# Allegro board TC275_lowvol_V015.brd
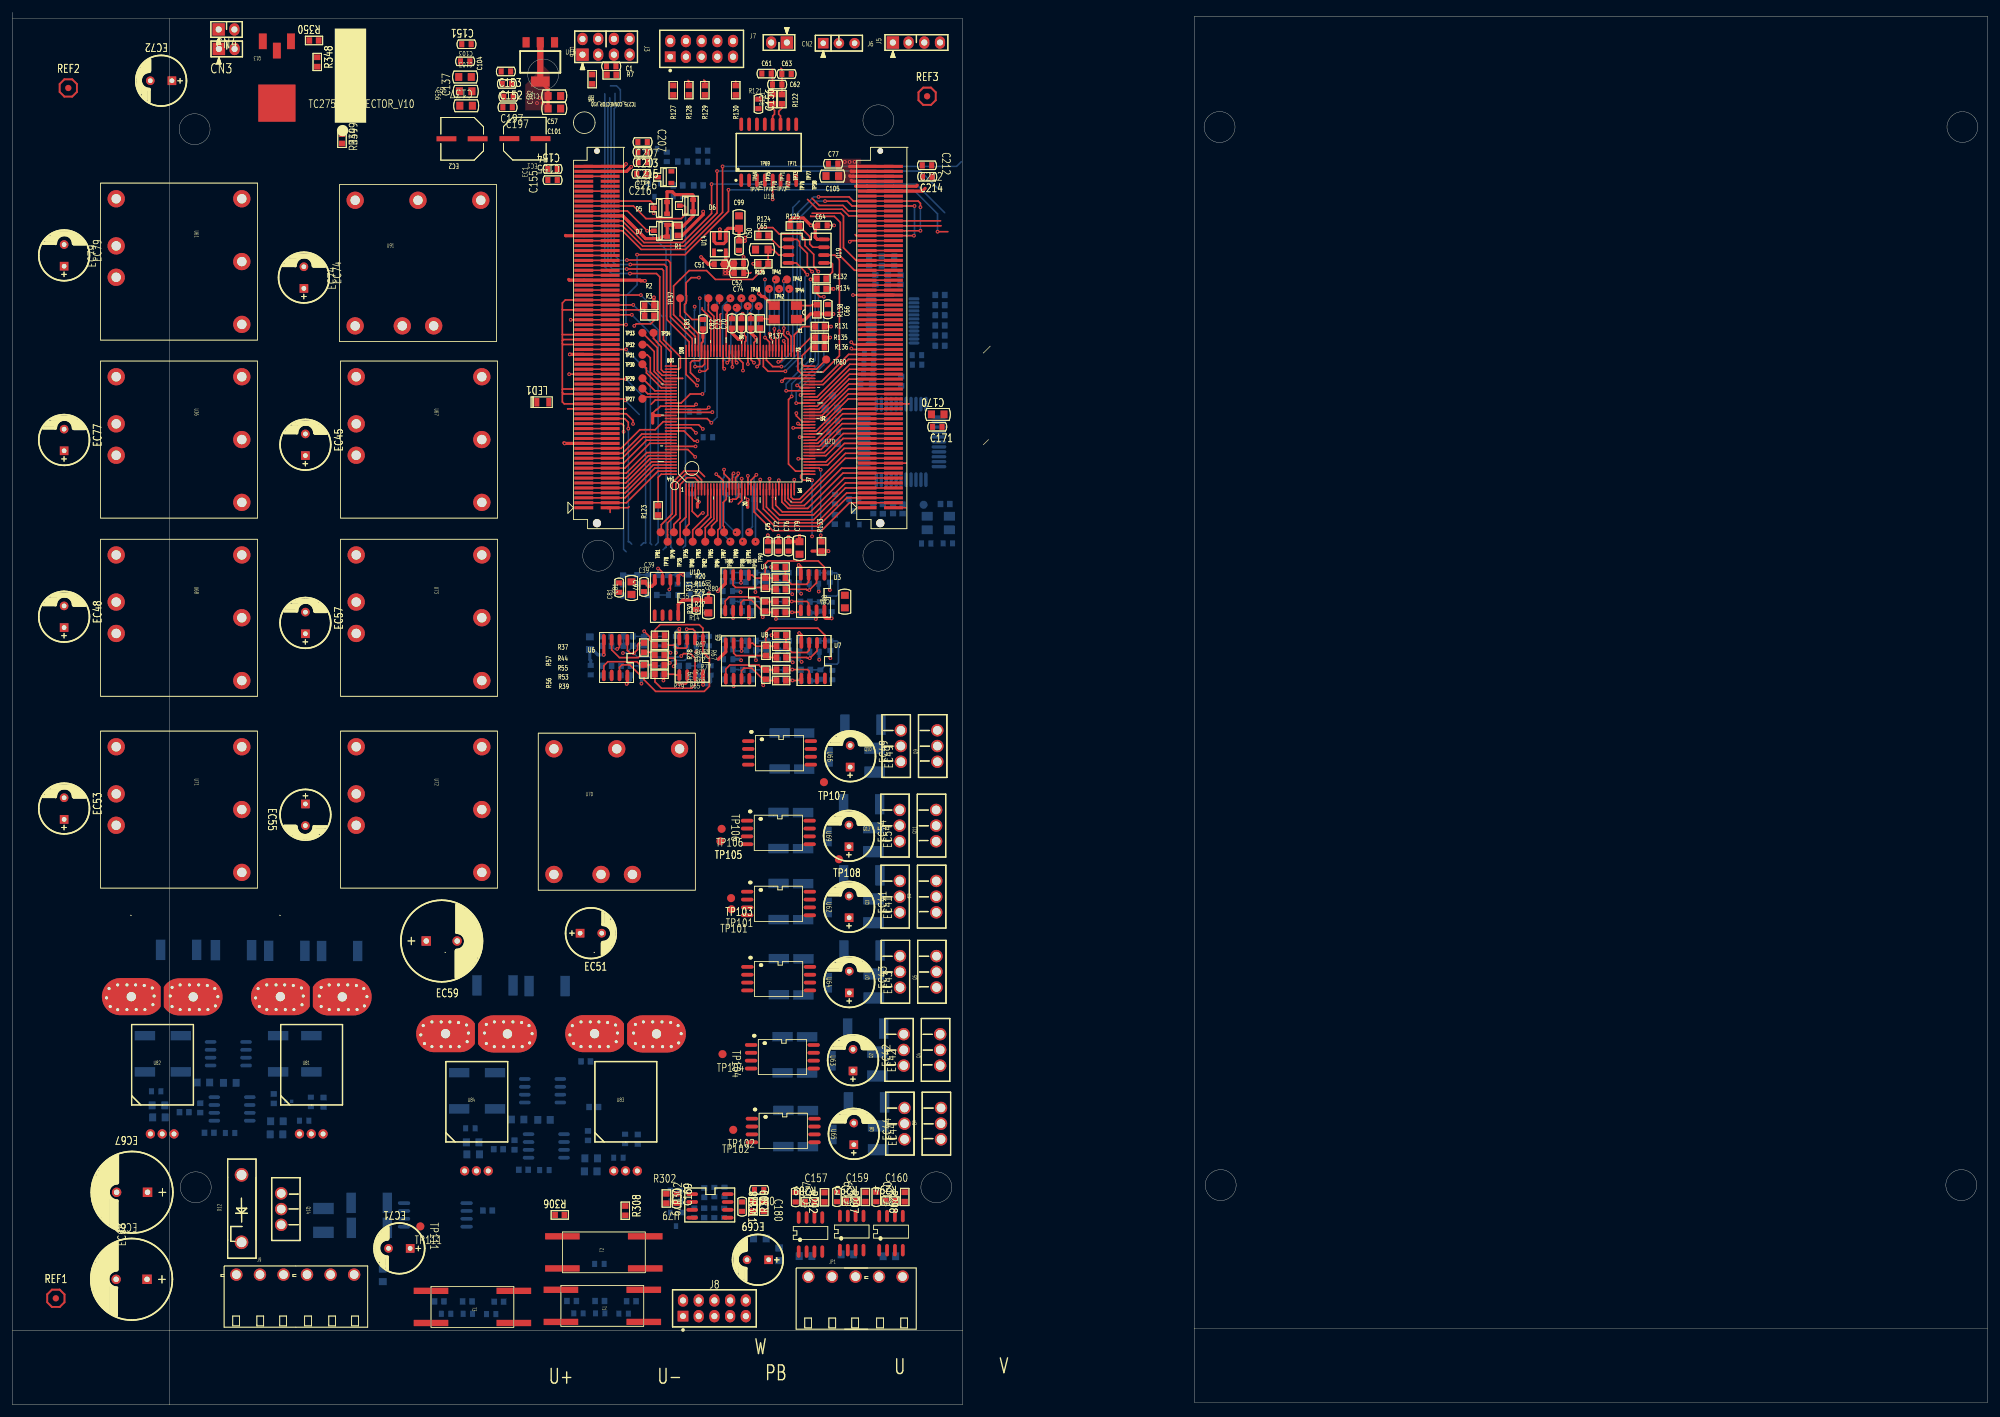
[diagram p0: board, top side]
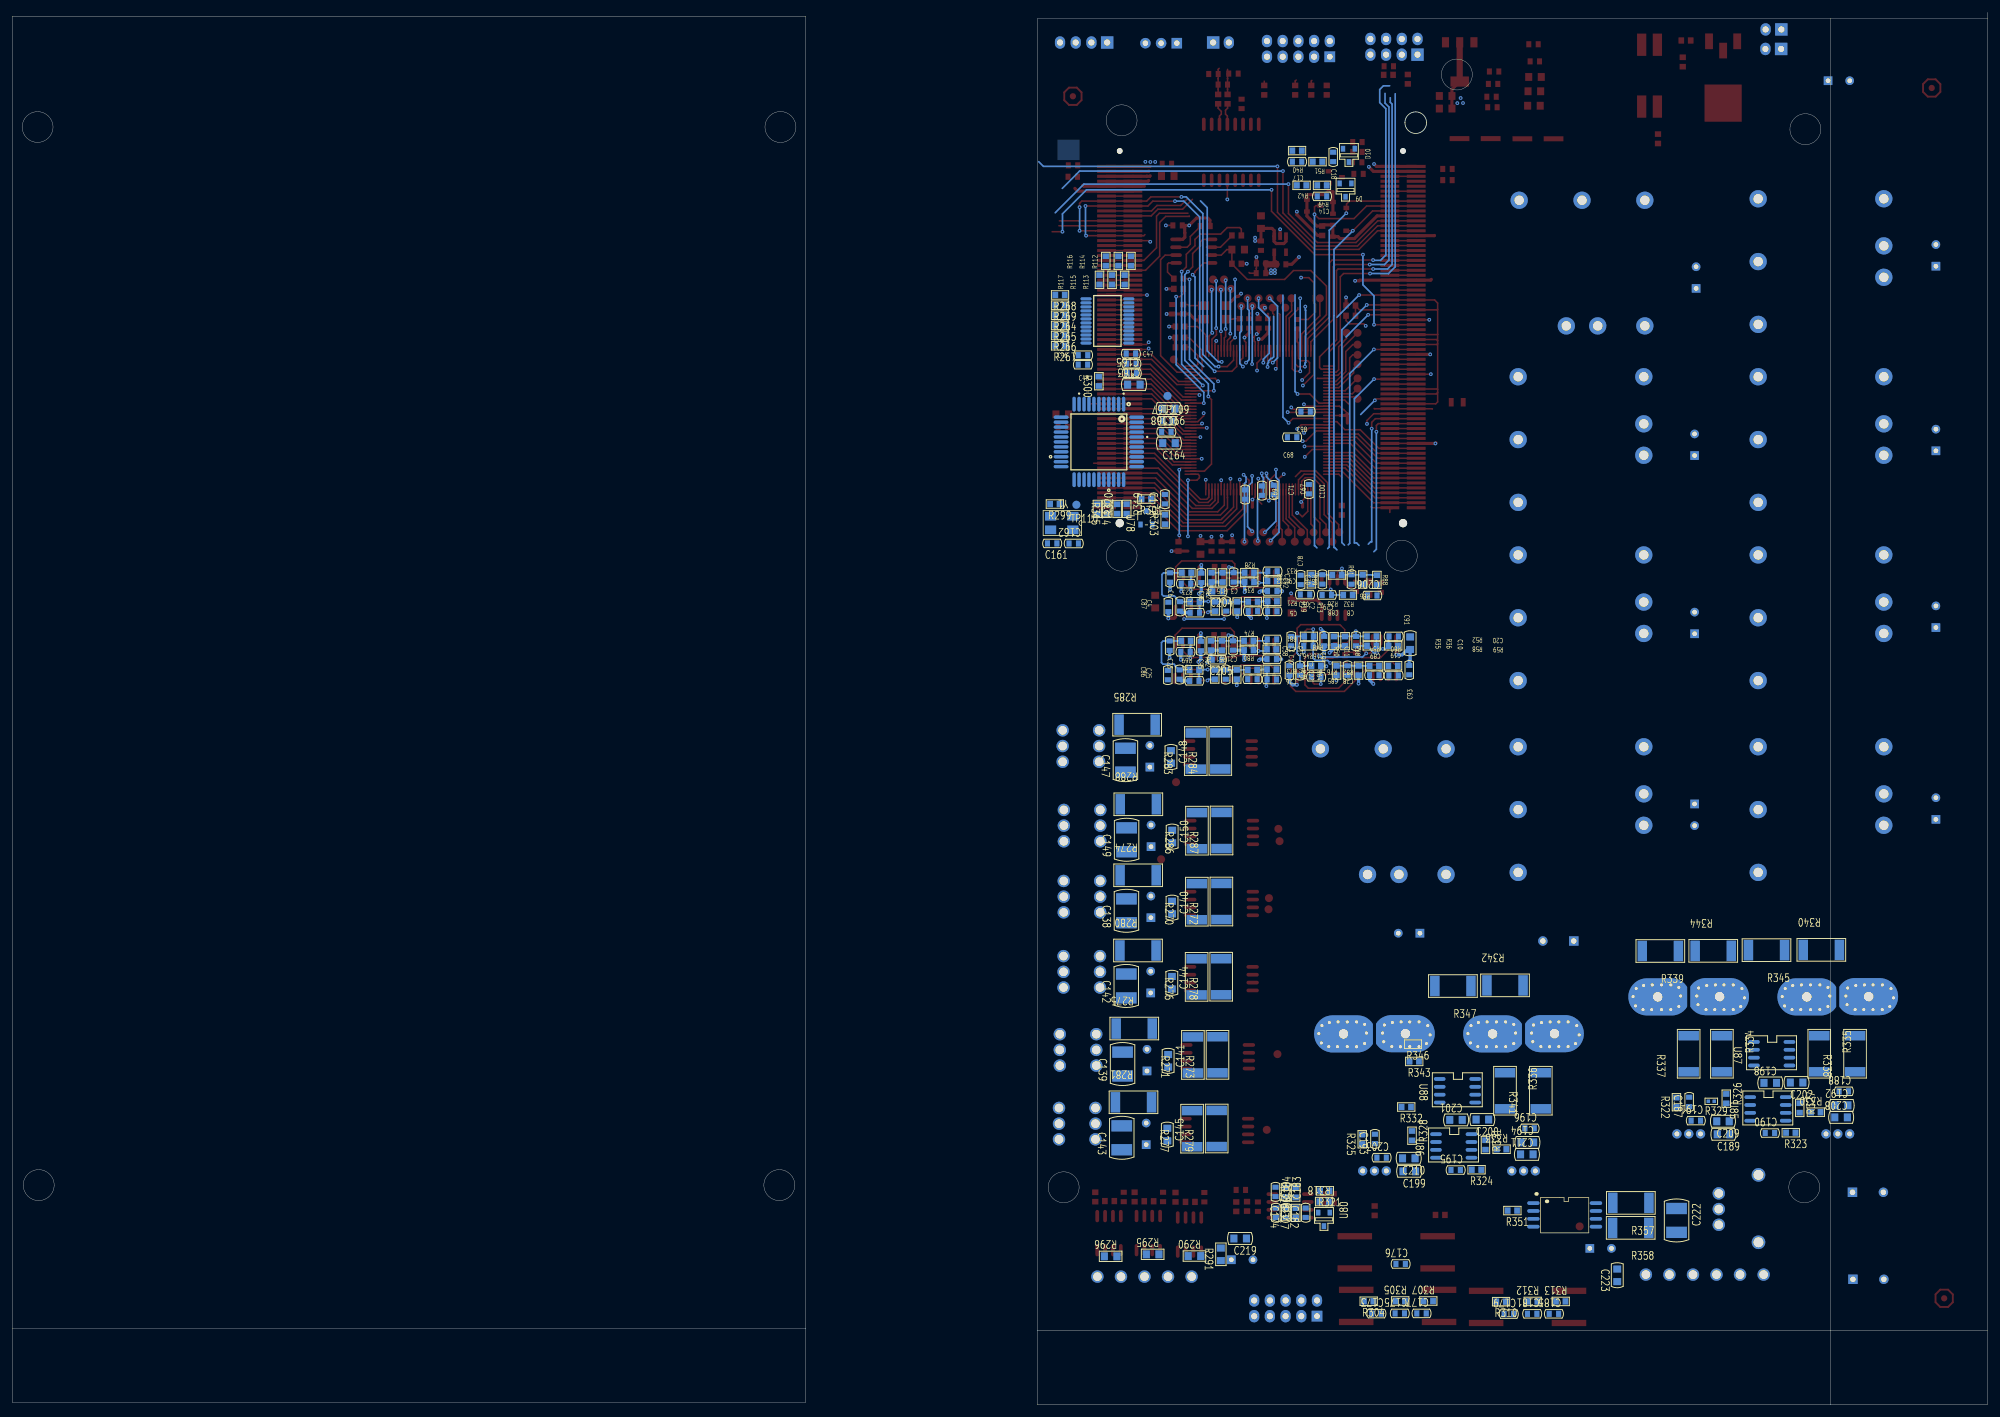
[diagram p1: board, bottom side, seen from below]

Outline 319.47 x 225.2 mm; copper layers: TOP, L2, L3, BOTTOM. Coordinates in mm from the lower left corner of the outline.
Outline path: circle c94.75,137.31 r2.5 ; circle c140.07,207.74 r2.5 ; circle c140.07,137.31 r2.5 ; 0,225.2 0,0 25.4,0 ; 25.4,224.21 0,224.21 ; 25.4,224.21 153.7,224.21 153.7,11.96 ; 25.4,224.21 25.4,11.96 ; 25.4,11.96 0,11.96 ; 25.4,11.96 25.4,11.96 ; 25.4,11.96 25.4,0 ; 25.4,11.96 153.7,11.96 ; 25.4,0 153.7,0 153.7,11.96 ; 191.17,12.31 191.17,224.56 319.47,224.56 319.47,12.31 ; 191.17,12.31 191.17,12.31 ; 191.17,12.31 191.17,0.35 319.47,0.35 319.47,12.31 ; 191.17,12.31 319.47,12.31 ; 26.98,206.3 arc(29.48,208.8) 31.98,206.3 arc(29.48,203.8) 26.98,206.3 ; 27.16,35.16 arc(29.66,37.66) 32.16,35.16 arc(29.66,32.66) 27.16,35.16 ; 83.34,215.15 arc(85.84,217.65) 88.34,215.15 arc(85.84,212.65) 83.34,215.15 ; 90.75,207.36 arc(92.5,209.11) 94.25,207.36 arc(92.5,205.61) 90.75,207.36 ; 146.94,35.16 arc(149.44,37.66) 151.94,35.16 arc(149.44,32.66) 146.94,35.16 ; 192.74,206.65 arc(195.24,209.15) 197.74,206.65 arc(195.24,204.15) 192.74,206.65 ; 192.93,35.51 arc(195.43,38.01) 197.93,35.51 arc(195.43,33.01) 192.93,35.51 ; 312.71,35.51 arc(315.21,38.01) 317.71,35.51 arc(315.21,33.01) 312.71,35.51 ; 312.89,206.65 arc(315.39,209.15) 317.89,206.65 arc(315.39,204.15) 312.89,206.65

## Design rules (mm)
net group A: nets A N17041093
net group B: nets B N17045363
net group C_BREAK: nets C_BREAK N17094622
net group C_PU+: nets C_PU+ N16973526
net group C_PU-: nets C_PU- N16973522
net group C_PV+: nets C_PV+ N16973520
net group C_PV-: nets C_PV- N16973518
net group C_PW+: nets C_PW+ N16973530
net group C_PW-: nets C_PW- N16973528
net group FPGA_CLK: nets FPGA_CLK N17139288
net group FPGA_TCK: nets FPGA_TCK TCK
net group FPGA_TDI: nets FPGA_TDI TDI
net group FPGA_TDO: nets FPGA_TDO TDO
net group FPGA_TMS: nets FPGA_TMS TMS
net group IDC_C: nets IDC_C N17070805
net group IV-GND_MOSFET: nets IV-GND_MOSFET N17066368
net group IV-U: nets IV-U N17058735
net group IV-V: nets IV-V N17059296
net group IV-W: nets IV-W N17059609
net group SPI_MISO: nets N17138057 SPI_MISO
net group SPI_MOSI: nets N17138038 SPI_MOSI
net group VOE: nets N27283 VOE
net group Z: nets N17045756 Z
net group 15.0V: nets 15.0V N17040946 N17041061 N17045357 N17045736
net group GND_AH: nets GND_AH N17025315 VCCAH
net group GND_AL: nets GND_AL N17025349 VCCAL
net group GND_BH: nets GND_BH N17025537 VCCBH
net group GND_BL: nets GND_BL N17025571 VCCBL
net group GND_CH: nets GND_CH N17024619 VCCCH
net group GND_CL: nets GND_CL N17025118 VCCCL
net group POWER: nets +15V -15V GND_POWER GND_SIGNAL
net group U_A: nets N17073095 U_A VUV_C
net group V_A: nets 2.5V N17071802 N17073081 N17073530 V_A
net group VDC_C: nets N26969 N17071810 VDC_C
net group W_A: nets N17073583 VVW_C W_A
nets with their own width: min track width 0.305; nets 3.3V 5.0V

## Placement (name value [footprint] x y rotation side)
C1  10u/6.3V  [C0603_01]  96.86 216.47 0 top
C2  104/25V  [C0603_01]  123.14 129.11 270 bottom
C3  104/25V  [C0603_01]  121.96 133.81 270 bottom
C4  100p/50V  [C0603_01]  130.61 129.11 270 bottom
C5  102  [C0603_01]  128.22 128.09 0 bottom
C6  102  [C0603_01]  132.22 133.78 270 bottom
C7  102  [C0603_01]  129.65 132.79 0 bottom
C8  104/25V  [C0603_01]  115.69 128.31 0 bottom
C9  104/25V  [C0603_01]  115.66 134.79 0 bottom
C10  104/25V  [C0603_01]  102.15 123.5 270 bottom
C11  104/25V  [C0603_01]  103.52 118.74 270 bottom
C12  102  [C0603_01]  112.64 123.5 270 bottom
C13  102  [C0603_01]  109.85 122.74 0 bottom
C14  102  [C0603_01]  107.66 195.44 0 bottom
C15  100p/50V  [C0603_01]  111.22 118.73 270 bottom
C16  102  [C0603_01]  108.6 117.72 0 bottom
C17  102  [C0603_01]  111.69 201.05 0 bottom
C18  102  [C0603_01]  105.84 201.81 90 bottom
C19  104/25V  [C0603_01]  96.07 117.94 0 bottom
C20  104/25V  [C0603_01]  96.06 124.26 0 bottom
C21  104/25V  [C0603_01]  122.04 122.79 270 bottom
C22  104/25V  [C0603_01]  123.23 118.09 270 bottom
C23  102  [C0603_01]  132.3 122.76 270 bottom
C24  102  [C0603_01]  129.73 121.77 0 bottom
C25  100p/50V  [C0603_01]  130.69 118.09 270 bottom
C26  102  [C0603_01]  128.31 117.07 0 bottom
C27  104/25V  [C0603_01]  115.75 123.77 0 bottom
C28  104/25V  [C0603_01]  115.77 117.29 0 bottom
C29  104/25V  [C0603_01]  106.88 130.96 180 bottom
C30  104/25V  [C0603_01]  102.88 133.46 90 bottom
C31  103  [C0603_01]  107.59 133.47 270 bottom
C34  104/25V  [C0603_01]  112.93 118.75 90 bottom
C35  104/25V  [C0603_01]  110.61 129.38 270 top
C38  104/25V  [C0603_01]  115.79 120.58 0 bottom
C39  104/25V  [C0603_01]  102.16 132.28 270 top
C46  104/25V  [C0603_01]  146.3 169.75 0 bottom
C47  104/25V  [C0603_01]  138.56 170 180 bottom
C48  104/25V  [C0603_01]  146.32 168.21 0 bottom
C49  104/25V  [C0603_01]  138.49 168.37 180 bottom
C50  105/6.3V  [C0603_01]  117.53 187.46 270 top
C51  10u/6.3V  [C0603_01]  114.27 184.45 180 top
C52  102  [C0603_01]  117.5 184.59 0 top
C56  10uF/16V  [C0805_01]  73.31 212.44 180 top
C57  10uF/16V  [C0805_01]  87.66 211.67 0 top
C61  100p/50V  [C0603_01]  121.98 215.29 180 top
C62  100p/50V  [C0603_01]  123.7 213.52 180 top
C63  100p/50V  [C0603_01]  125.21 215.23 180 top
C64  104/25V  [C0603_01]  131.02 190.74 0 top
C65  10uF/16V  [C0805_01]  121.21 186.82 180 top
C66  104/25V  [C0603_01]  131.88 177.17 90 top
C67  104/25V  [C0603_01]  115.47 147.94 270 bottom
C68  104/25V  [C0603_01]  112.49 156.48 0 bottom
C69  104/25V  [C0603_01]  120.07 147.21 270 bottom
C70  104/25V  [C0603_01]  119.43 174.89 90 top
C71  104/25V  [C0603_01]  117.39 147.84 270 bottom
C72  104/25V  [C0603_01]  123.9 138.81 270 top
C73  104/25V  [C0603_01]  117.91 174.89 90 top
C74  104/25V  [C0603_01]  117.53 183.01 0 top
C75  104/25V  [C0603_01]  122.19 138.82 270 top
C76  104/25V  [C0603_01]  125.53 138.82 270 top
C77  104/25V  [C0603_01]  132.74 200.71 180 top
C78  104/25V  [C0603_01]  111.11 133.4 90 bottom
C79  10uF/16V  [C0805_01]  127.31 138.56 270 top
C80  10uF/16V  [C0805_01]  112.58 129.08 270 top
C81  10uF/16V  [C0805_01]  100.13 132.07 270 top
C82  104/25V  [C0603_01]  116.39 174.89 90 top
C83  104/25V  [C0603_01]  111.69 174.76 90 top
C84  10uF/16V  [C0805_01]  134.64 129.89 90 top
C85  104/25V  [C0603_01]  118.91 117.33 180 bottom
C86  104/25V  [C0603_01]  132.59 118.01 90 bottom
C87  104/25V  [C0603_01]  132.51 129.03 90 bottom
C88  104/25V  [C0603_01]  118.83 128.35 180 bottom
C89  104/25V  [C0603_01]  99.2 117.98 180 bottom
C90  104/25V  [C0603_01]  110.4 131.03 180 bottom
C91  10uF/16V  [C0805_01]  93.4 123.16 90 bottom
C92  104/25V  [C0603_01]  115.7 131.6 0 bottom
C93  104/25V  [C0603_01]  93.55 118.81 270 bottom
C94  104/25V  [C0603_01]  107.31 123.5 270 bottom
C95  104/25V  [C0603_01]  127.26 122.71 270 bottom
C96  104/25V  [C0603_01]  127.18 133.73 270 bottom
C97  104/25V  [C0603_01]  98.14 132.16 270 top
C98  104/25V  [C0603_01]  110.3 160.61 0 bottom
C99  10uF/16V  [C0805_01]  117.53 191.27 90 top
C100  104/25V  [C0603_01]  109.78 148.08 270 bottom
C101  10uF/16V  [C0805_01]  87.66 209.64 0 top
C102  104/25V  [C0603_01]  80.24 211.55 0 top
C103  10uF/16V  [C0805_01]  73.21 214.74 180 top
C104  104/25V  [C0603_01]  73.24 217.27 180 top
C105  10uF/16V  [C0805_01]  132.6 198.72 180 top
C137  10uF/50V  [C0805_01]  73.38 210.09 180 top
C138  334/250V  [C1812_01]  139.28 79.88 270 bottom
C139  334/250V  [C1812_01]  139.91 55.09 270 bottom
C140  104/50V  [C0805_01]  131.91 80.4 90 bottom
C141  104/50V  [C0805_01]  132.54 55.62 90 bottom
C142  334/250V  [C1812_01]  139.31 67.72 270 bottom
C143  334/250V  [C1812_01]  140.04 43.16 270 bottom
C144  104/50V  [C0805_01]  131.94 68.24 90 bottom
C145  104/50V  [C0805_01]  132.67 43.69 90 bottom
C147  334/250V  [C1812_01]  139.45 104.24 270 bottom
C148  104/50V  [C0805_01]  132.08 104.76 90 bottom
C149  334/250V  [C1812_01]  139.26 91.37 270 bottom
C150  104/50V  [C0805_01]  131.88 91.89 90 bottom
C151  104/25V  [C0603_01]  73.45 220.04 180 top
C152  104/25V  [C0603_01]  79.99 213.62 0 top
C153  104/25V  [C0603_01]  79.82 215.64 0 top
C154  104/25V  [C0603_01]  87.37 199.87 180 top
C155  104/25V  [C0603_01]  87.37 198.06 180 top
C156  104/25V  [C0603_01]  120.67 210.39 90 top
C157  104/25V  [C0603_01]  126.69 33.55 90 top
C159  104/25V  [C0603_01]  133.37 33.59 90 top
C160  104/25V  [C0603_01]  139.72 33.59 90 top
C161  22p  [C0603_01]  151.3 139.3 180 bottom
C162  22p  [C0603_01]  147.81 139.29 0 bottom
C163  10uF/16V  [C0805_01]  138.08 164.98 0 bottom
C164  10uF/16V  [C0805_01]  132.41 155.52 180 bottom
C165  0.01uF/50V  [C0603_01]  138.42 166.82 0 bottom
C166  10uF/16V  [C0805_01]  132.45 161.1 180 bottom
C167  0.01uF/50V  [C0603_01]  132.66 159.14 0 bottom
C168  0.1uF/25V  [C0603_01]  132.83 157.35 0 bottom
C169  120p/50V  [C0603_01]  107.43 33.32 90 top
C170  10uF/16V  [C0805_01]  149.66 160.17 180 top
C171  0.01uF/50V  [C0603_01]  149.59 158.17 0 top
C172  1uF/6.3V  [C0603_01]  133.07 146.46 270 bottom
C173  1nF/50V  [C0603_01]  98.86 14.72 0 bottom
C174  0.1uF/25V  [C0603_01]  113.53 31.02 270 bottom
C175  100p/50V  [C0603_01]  95.07 14.76 0 bottom
C176  1nF/50V  [C0603_01]  94.94 22.75 0 bottom
C177  1nF/50V  [C0603_01]  91.56 14.76 0 bottom
C178  120p/50V  [C0603_01]  118.02 32.02 90 top
C179  1nF/50V  [C0603_01]  77.45 14.65 0 bottom
C180  1uF/6.3V  [C0603_01]  120.78 34.73 0 top
C181  100p/50V  [C0603_01]  73.66 14.69 0 bottom
C182  0.1uF/25V  [C0603_01]  110.3 31.04 270 bottom
C183  0.1uF/25V  [C0603_01]  113.55 34.39 90 bottom
C184  0.1uF/25V  [C0603_01]  115.18 34.41 90 bottom
C185  1nF/50V  [C0603_01]  70.14 14.69 0 bottom
C186  0.01uF/50V  [C0603_01]  115.12 31.03 90 bottom
C187  120p/50V  [C0603_01]  48.28 48.96 270 bottom
C188  104/25V  [C0603_01]  23.26 50.68 0 bottom
C189  10uF/16V  [C0805_01]  42.72 43.72 180 bottom
C190  120p/50V  [C0603_01]  35.21 43.93 0 bottom
C191  104/25V  [C0603_01]  47.2 45.94 0 bottom
C192  10uF/16V  [C0805_01]  23.62 48.41 0 bottom
C193  120p/50V  [C0603_01]  99.1 42.98 270 bottom
C194  10uF/16V  [C0805_01]  74.45 42.42 0 bottom
C195  120p/50V  [C0603_01]  86.04 37.95 0 bottom
C196  104/25V  [C0603_01]  74.08 44.69 0 bottom
C197  104/25V  [C0603_01]  80.09 209.84 0 top
C198  10uF/16V  [C0805_01]  35.16 52.04 0 bottom
C199  10uF/16V  [C0805_01]  93.54 37.74 180 bottom
C200  10uF/16V  [C0805_01]  81.72 46.11 180 bottom
C201  10uF/16V  [C0805_01]  85.98 46.06 0 bottom
C202  10uF/16V  [C0805_01]  30.9 52.1 180 bottom
C203  104/25V  [C0603_01]  98.02 39.95 0 bottom
C204  104/25V  [C0603_01]  124.56 131.54 180 bottom
C205  104/25V  [C0603_01]  124.65 120.5 180 bottom
C206  104/25V  [C0603_01]  99.53 130.88 0 bottom
C207  104/25V  [C0603_01]  101.93 204.22 0 top
C208  10uF/16V  [C0805_01]  23.71 46.46 0 bottom
C209  10uF/16V  [C0805_01]  42.8 45.83 180 bottom
C210  10uF/16V  [C0805_01]  93.62 39.84 180 bottom
C211  10uF/16V  [C0805_01]  74.53 40.48 0 bottom
C212  104/25V  [C0603_01]  147.92 200.45 0 top
C213  104/25V  [C0603_01]  101.93 202.62 0 top
C214  104/25V  [C0603_01]  147.97 198.61 0 top
C215  104/25V  [C0603_01]  101.96 200.95 0 top
C216  104/25V  [C0603_01]  101.75 199.07 0 top
C219  104/50V  [C0805_01]  120.89 26.87 180 bottom
C222  334/250V  [C1812_01]  50.31 29.79 90 bottom
C223  104/50V  [C0805_01]  59.91 20.91 270 bottom
CN2  2.54X  [HE_HDR254M-1X2]  123.99 220.32 180 top
CN3  2.54X  [HE_HDR254M-1X2]  34.67 219.28 0 top
CN4  2.54X  [HE_HDR254M-1X2]  34.64 222.44 0 top
D5  BAT54C  [SOT23DA_01]  104.8 193.57 0 top
D6  BAT54C  [SOT23DA_01]  109.02 193.94 0 top
D7  BAT54C  [SOT23DA_01]  104.83 189.87 0 top
D9  BAT54S/SOT  [SOT23DA_01]  103.85 196.45 90 bottom
D10  BAT54S/SOT  [SOT23DA_01]  103.3 202.07 90 bottom
D11  BAT54S/SOT  [SOT23DA_01]  105.5 198.54 0 top
D12  -  [APT30D120BG]  37.86 31.71 90 top
EC1  100uF/16V  [ELC0605_01]  82.88 204.77 180 top
EC2  100uF/16V  [ELC0605_01]  72.75 204.75 0 top
EC41  47uF/50V  [XELC3R5X8R0_0R5_00]  135.33 80.51 90 top
EC42  47uF/50V  [XELC3R5X8R0_0R5_00]  135.96 55.72 90 top
EC43  47uF/50V  [XELC3R5X8R0_0R5_00]  135.36 68.35 90 top
EC44  47uF/50V  [XELC3R5X8R0_0R5_00]  136.09 43.79 90 top
EC45  47uF/100V  [XELC3R5X8R0_0R5_00]  47.39 155.26 90 top
EC48  47uF/100V  [XELC3R5X8R0_0R5_00]  8.37 127.44 90 top
EC49  47uF/50V  [XELC3R5X8R0_0R5_00]  135.5 104.87 90 top
EC51  47uF/100V  [XELC3R5X8R0_0R5_00]  93.57 76.26 0 top
EC53  47uF/100V  [XELC3R5X8R0_0R5_00]  8.37 96.42 90 top
EC54  47uF/50V  [XELC3R5X8R0_0R5_00]  135.31 92 90 top
EC55  47uF/100V  [XELC3R5X8R0_0R5_00]  47.39 95.41 270 top
EC57  47uF/100V  [XELC3R5X8R0_0R5_00]  47.39 126.44 90 top
EC59  220uF/100V  [XELC5R0X13R0_0R6_00]  69.44 74.99 0 top
EC67  220uF/100V  [XELC5R0X13R0_0R6_00]  19.36 34.35 180 top
EC68  220uF/100V  [XELC5R0X13R0_0R6_00]  19.28 20.27 180 top
EC69  47uF/50V  [XELC3R5X8R0_0R5_00]  120.57 23.43 180 top
EC71  47uF/50V  [XELC3R5X8R0_0R5_00]  62.59 25.28 180 top
EC72  47uF/100V  [XELC3R5X8R0_0R5_00]  24.06 214.14 180 top
EC74  47uF/100V  [XELC3R5X8R0_0R5_00]  47.15 182.3 90 top
EC77  47uF/100V  [XELC3R5X8R0_0R5_00]  8.37 156.03 90 top
EC79  47uF/100V  [XELC3R5X8R0_0R5_00]  8.37 185.89 90 top
J3  CON8  [HDR254M_34-2X4]  92.21 218.36 0 top
J5  CON4  [HDR254M-1X4]  142.41 220.32 0 top
J6  CONN PCB 3-R  [HE_HEADER_SIP_F_2D54_03_01-1X3]  133.68 220.21 0 top
J7  CON_10A/F_0  [DIR2_54_2X5]  106.4 218.02 0 top
J8  CON_10A/F_0  [DIR2_54_2X5]  108.47 14.31 0 top
J9  -  [CON6]  45.8 21.03 0 top
JP1  Header 5  [HEADER5]  138.32 20.71 0 top
LED1  green  [LED0805_11]  85.79 162.14 180 top
Q1  -  [CSD19536KCS]  149.43 82.17 90 top
Q2  -  [CSD19536KCS]  144.16 57.38 90 top
Q3  -  [CSD19536KCS]  143.53 82.17 90 top
Q4  -  [CSD19536KCS]  150.06 57.38 90 top
Q5  -  [CSD19536KCS]  149.46 70.01 90 top
Q6  -  [CSD19536KCS]  150.19 45.45 90 top
Q7  -  [CSD19536KCS]  143.56 70.01 90 top
Q8  -  [CSD19536KCS]  144.29 45.45 90 top
Q9  -  [CSD19536KCS]  149.6 106.53 90 top
Q10  -  [CSD19536KCS]  143.7 106.53 90 top
Q11  -  [CSD19536KCS]  149.41 93.65 90 top
Q12  -  [CSD19536KCS]  143.51 93.65 90 top
Q13  IRFR120  [HE_TO-252AA]  42.78 215.52 180 top
Q14  -  [CSD19536KCS]  43.48 31.63 270 top
R1  100K  [R0603_01]  107.62 189.87 270 top
R2  100K  [R0603_01]  103.01 177.78 180 top
R3  100K  [R0603_01]  103.01 176.13 180 top
R6  100K  [R0603_01]  93.78 214.39 90 top
R7  100K  [R0603_01]  96.92 215.1 180 top
R12  1K  [R0603_01]  125.51 133.81 90 bottom
R13  820R  [R0603_01]  121.37 129.11 90 bottom
R14  1M  [R0603_01]  124.26 128.15 180 top
R15  1K  [R0603_01]  123.73 133.81 90 bottom
R16  1M  [R0603_01]  124.27 133.68 180 top
R19  22.1K  [R0603_01]  124.92 129.11 270 bottom
R20  22.1K  [R0603_01]  124.26 135.48 0 top
R21  470R  [R0603_01]  128.22 129.87 180 bottom
R23  470R  [R0603_01]  129.58 134.57 180 bottom
R26  3.01K  [R0603_01]  118.83 129.87 0 bottom
R27  22.1K  [R0603_01]  124.26 129.92 0 top
R28  3.01K  [R0603_01]  119.42 134.57 0 bottom
R29  22.1K  [R0603_01]  124.27 131.88 0 top
R30  1M  [R0603_01]  121.78 129.09 270 top
R31  1M  [R0603_01]  121.8 132.94 90 top
R32  820R  [R0603_01]  115.7 129.94 0 bottom
R33  1K  [R0603_01]  115.71 133.2 0 bottom
R34  1K  [R0603_01]  119.42 133.05 180 bottom
R35  1K  [R0603_01]  105.71 123.5 90 bottom
R36  1K  [R0603_01]  103.93 123.5 90 bottom
R37  1M  [R0603_01]  104.74 124.42 180 top
R38  820R  [R0603_01]  101.74 118.74 90 bottom
R39  1M  [R0603_01]  104.69 118.14 180 top
R40  1K  [R0603_01]  111.69 202.83 0 bottom
R42  1K  [R0603_01]  110.96 197.22 0 bottom
R44  22.1K  [R0603_01]  104.7 122.83 0 top
R46  470R  [R0603_01]  109.77 124.26 180 bottom
R48  470R  [R0603_01]  108.6 119.5 180 bottom
R49  470R  [R0603_01]  107.66 197.22 180 bottom
R50  22.1K  [R0603_01]  105.3 118.74 270 bottom
R51  470R  [R0603_01]  108.38 201.05 180 bottom
R52  3.01K  [R0603_01]  99.61 124.26 0 bottom
R53  22.1K  [R0603_01]  104.69 119.66 0 top
R54  3.01K  [R0603_01]  99.2 119.5 0 bottom
R55  22.1K  [R0603_01]  104.67 121.23 0 top
R56  1M  [R0603_01]  102.15 118.9 270 top
R57  1M  [R0603_01]  102.15 122.45 90 top
R58  1K  [R0603_01]  99.61 122.74 180 bottom
R59  820R  [R0603_01]  96.13 122.74 0 bottom
R60  1K  [R0603_01]  96.16 119.5 0 bottom
R61  1K  [R0603_01]  123.81 122.79 90 bottom
R62  1K  [R0603_01]  125.59 122.79 90 bottom
R63  1M  [R0603_01]  124.35 122.66 180 top
R64  820R  [R0603_01]  121.45 118.09 90 bottom
R65  1M  [R0603_01]  124.34 117.12 180 top
R67  22.1K  [R0603_01]  124.34 124.46 0 top
R69  470R  [R0603_01]  129.66 123.55 180 bottom
R71  22.1K  [R0603_01]  125 118.09 270 bottom
R72  22.1K  [R0603_01]  124.35 120.86 0 top
R73  470R  [R0603_01]  128.31 118.85 180 bottom
R74  3.01K  [R0603_01]  119.5 123.55 0 bottom
R76  3.01K  [R0603_01]  118.91 118.85 0 bottom
R77  22.1K  [R0603_01]  124.34 118.89 0 top
R78  1M  [R0603_01]  121.88 121.92 90 top
R79  1M  [R0603_01]  121.86 118.07 270 top
R80  1K  [R0603_01]  119.5 122.02 180 bottom
R81  1K  [R0603_01]  115.79 122.17 0 bottom
R82  820R  [R0603_01]  115.79 118.92 0 bottom
R83  1K  [R0603_01]  109.37 133.47 90 bottom
R85  470R  [R0603_01]  103.46 130.96 0 bottom
R88  0R  [R0603_01]  98.78 133.4 90 bottom
R89  2K  [R0603_01]  101.08 133.46 90 bottom
R91  100K  [R0603_01]  105.23 134.2 0 bottom
R112  10K  [R0603_01]  138.56 184.99 270 bottom
R113  10K  [R0603_01]  139.58 181.94 270 bottom
R114  10K  [R0603_01]  140.59 184.99 270 bottom
R115  10K  [R0603_01]  141.61 181.94 270 bottom
R116  10K  [R0603_01]  142.63 184.99 270 bottom
R117  10K  [R0603_01]  143.64 181.94 270 bottom
R121  0R  [R0603_01]  122.93 211.16 270 top
R122  0R  [R0603_01]  124.45 211.16 270 top
R123  4.7K  [R0603_01]  104.45 144.66 270 top
R124  33R  [R0603_01]  121.47 189.11 180 top
R125  10K  [R0603_01]  126.55 190.63 180 top
R126  5.1K  [R0603_01]  121.47 184.54 180 top
R127  10R  [R0603_01]  106.89 212.61 90 top
R128  10R  [R0603_01]  109.39 212.61 90 top
R129  10R  [R0603_01]  111.99 212.61 90 top
R130  10R  [R0603_01]  116.99 212.61 90 top
R131  4.7K  [R0603_01]  130.61 174.38 0 top
R132  33R  [R0603_01]  130.86 182.13 0 top
R133  4.7K  [R0603_01]  130.86 138.82 270 top
R134  4.7K  [R0603_01]  130.86 180.47 0 top
R135  4.7K  [R0603_01]  130.61 172.6 0 top
R136  4.7K  [R0603_01]  130.6 171.01 0 top
R137  33R  [R0603_01]  120.96 174.89 90 top
R138  100K  [R0603_01]  130.1 177.17 270 top
R264  100R  [R0603_01]  150.03 176.2 180 bottom
R265  100R  [R0603_01]  150.03 174.55 180 bottom
R266  100R  [R0603_01]  150.03 172.93 180 bottom
R267  100R  [R0603_01]  150.03 171.27 180 bottom
R268  100R  [R0603_01]  150.03 179.49 180 bottom
R269  100R  [R0603_01]  150.03 177.84 180 bottom
R270  3.3R  [R2512_01]  127.9 81.35 270 bottom
R271  3.3R  [R2512_01]  128.54 56.56 270 bottom
R272  10R  [R2512_01]  123.93 81.38 270 bottom
R273  10R  [R2512_01]  124.56 56.59 270 bottom
R274  0R  [R2512_01]  137.38 85.62 0 bottom
R275  0R  [R2512_01]  138.02 60.83 0 bottom
R276  3.3R  [R2512_01]  127.93 69.19 270 bottom
R277  3.3R  [R2512_01]  128.67 44.64 270 bottom
R278  10R  [R2512_01]  123.96 69.22 270 bottom
R279  10R  [R2512_01]  124.69 44.66 270 bottom
R280  0R  [R2512_01]  137.41 73.46 0 bottom
R281  0R  [R2512_01]  138.15 48.9 0 bottom
R283  3.3R  [R2512_01]  128.07 105.71 270 bottom
R284  10R  [R2512_01]  124.1 105.74 270 bottom
R285  0R  [R2512_01]  137.55 109.98 0 bottom
R286  3.3R  [R2512_01]  127.88 92.84 270 bottom
R287  10R  [R2512_01]  123.91 92.86 270 bottom
R288  0R  [R2512_01]  137.36 97.11 0 bottom
R289  1K  [R0603_01]  128.97 32.79 180 top
R290  5.1K  [R0805_01]  128.29 24.03 0 bottom
R291  0R  [R0805_01]  124.01 24.32 270 bottom
R292  0R  [R0603_01]  131.35 33.55 270 top
R293  1K  [R0603_01]  135.64 32.89 180 top
R294  1K  [R0603_01]  142.01 32.93 180 top
R295  5.1K  [R0805_01]  135.04 24.31 0 bottom
R296  5.1K  [R0805_01]  141.84 23.99 0 bottom
R297  0R  [R0603_01]  137.96 33.59 270 top
R298  0R  [R0603_01]  144.32 33.59 270 top
R299  0R  [R0603_01]  150.86 145.67 180 bottom
R300  0R  [R0603_01]  143.74 165.53 270 bottom
R301  100K  [R0603_01]  136.08 146.47 180 bottom
R302  15K  [R0603_01]  105.77 33.35 90 top
R303  10K  [R0603_01]  133.02 143.18 270 bottom
R304  100R  [R0603_01]  100.11 16.73 180 bottom
R305  100R  [R0603_01]  95 16.76 0 bottom
R306  33R  [R0603_01]  88.54 30.69 180 top
R307  100R  [R0603_01]  90.46 16.76 0 bottom
R308  33R  [R0603_01]  99.13 31.37 90 top
R309  15K  [R0603_01]  119.78 32.07 90 top
R310  100R  [R0603_01]  78.7 16.66 180 bottom
R311  10K  [R0603_01]  121.52 32.02 270 top
R312  100R  [R0603_01]  73.59 16.7 0 bottom
R313  100R  [R0603_01]  69.05 16.7 0 bottom
R314  10K  [R0603_01]  140.78 144.87 270 bottom
R315  10K  [R0603_01]  142.44 144.9 270 bottom
R316  100R  [R0603_01]  111.92 34.3 270 bottom
R317  100R  [R0603_01]  111.89 31.02 270 bottom
R318  14K_1%  [R0603_01]  107.33 32.84 0 bottom
R319  10K  [R0603_01]  139.25 144.88 90 bottom
R320  10K  [R0603_01]  143.98 144.88 90 bottom
R321  10K_1%  [R0603_01]  107.19 34.58 180 bottom
R322  470R  [R0603_01]  50.33 48.91 270 bottom
R323  470R  [R0603_01]  31.84 43.99 180 bottom
R324  470R  [R0603_01]  82.66 38 180 bottom
R325  470R  [R0603_01]  101.15 42.92 270 bottom
R326  49.9K/F  [R0603_01]  42.27 49.49 90 bottom
R327  49.9K/F  [R0603_01]  30.4 47.99 90 bottom
R328  49.9K/F  [R0603_01]  93.09 43.5 90 bottom
R329  10K/F  [R0402_11]  44.69 49.07 180 bottom
R330  10K/F  [R0603_01]  27.79 47.3 0 bottom
R331  49.9K/F  [R0603_01]  81.22 42 90 bottom
R332  10K/F  [R0603_01]  94.03 48.14 180 bottom
R333  10K/F  [R0603_01]  78.61 41.32 0 bottom
R334  2K/F  [R2512_01]  42.98 56.76 90 bottom
R335  2K/F  [R2512_01]  27.23 56.76 90 bottom
R336  2K/F  [R2512_01]  78.06 50.77 90 bottom
R337  49.9K/F  [R2512_01]  48.35 56.76 270 bottom
R338  49.9K/F  [R2512_01]  21.44 56.76 270 bottom
R339  49.9K/F  [R2512_01]  52.94 73.38 180 bottom
R340  49.9K/F  [R2512_01]  26.89 73.56 0 bottom
R341  49.9K/F  [R2512_01]  72.27 50.77 270 bottom
R342  49.9K/F  [R2512_01]  78.06 67.81 0 bottom
R343  10K/F  [R0603_01]  92.74 55.51 180 bottom
R344  2K/F  [R2512_01]  44.38 73.4 0 bottom
R345  2K/F  [R2512_01]  35.77 73.51 180 bottom
R346  10K/F  [R0603_01]  92.95 58.31 180 bottom
R347  2K/F  [R2512_01]  86.48 67.71 180 bottom
R348  20K  [R0603_01]  49.31 217.17 90 top
R349  100R  [R0603_01]  53.31 204.74 90 top
R350  100K  [R0603_01]  48.79 220.65 180 top
R351  100R  [R0603_01]  76.86 31.39 180 bottom
R357  3.3R  [R2512_01]  57.71 32.63 180 bottom
R358  10R  [R2512_01]  57.73 28.59 180 bottom
REF1  -  [REFPOINT]  7.03 17.2 0 top
REF2  -  [REFPOINT]  9.04 212.97 0 top
REF3  -  [REFPOINT]  147.94 211.63 0 top
T1  PLT10HH1026R0PN  [HE_PLT10H]  95.42 15.98 270 top
T2  PLT10HH1026R0PN  [HE_PLT10H]  95.65 24.63 90 top
T3  PLT10HH1026R0PN  [HE_PLT10H]  74.41 15.81 270 top
TP27  TP_1D3  [TP_1D3_1]  101.91 162.69 270 top
TP28  TP_1D3  [TP_1D3_1]  101.91 164.35 270 top
TP29  TP_1D3  [TP_1D3_1]  101.91 166 270 top
TP30  TP_1D3  [TP_1D3_1]  101.91 168.28 270 top
TP31  TP_1D3  [TP_1D3_1]  101.91 169.81 270 top
TP32  TP_1D3  [TP_1D3_1]  101.91 171.46 270 top
TP33  TP_1D3  [TP_1D3_1]  101.91 173.36 270 top
TP34  TP_1D3  [TP_1D3_1]  103.69 173.36 270 top
TP35  TP_1D3  [TP_1D3_1]  108 139.58 270 top
TP36  TP_1D3  [TP_1D3_1]  109.02 141.1 270 top
TP37  TP_1D3  [TP_1D3_1]  108 178.95 270 top
TP38  TP_1D3  [TP_1D3_1]  120.7 177.68 270 top
TP40  TP_1D3  [TP_1D3_1]  122.35 180.47 0 top
TP41  TP_1D3  [TP_1D3_1]  123.5 182 0 top
TP42  TP_1D3  [TP_1D3_1]  124.01 180.47 0 top
TP43  TP_1D3  [TP_1D3_1]  125.28 182 270 top
TP44  TP_1D3  [TP_1D3_1]  125.66 180.47 270 top
TP60  TP_1D3  [TP_1D3_1]  131.63 169.04 270 top
TP69  TP_1D3  [TP_1D3_1]  112.58 178.95 0 top
TP70  TP_1D3  [TP_1D3_1]  115.62 177.43 0 top
TP71  TP_1D3  [TP_1D3_1]  116.13 178.95 0 top
TP72  TP_1D3  [TP_1D3_1]  117.15 177.43 0 top
TP73  TP_1D3  [TP_1D3_1]  117.91 178.95 0 top
TP74  TP_1D3  [TP_1D3_1]  113.59 177.43 0 top
TP75  TP_1D3  [TP_1D3_1]  114.35 178.95 0 top
TP76  TP_1D3  [TP_1D3_1]  118.93 177.68 0 top
TP77  TP_1D3  [TP_1D3_1]  119.69 178.95 0 top
TP78  TP_1D3  [TP_1D3_1]  105.97 139.58 0 top
TP79  TP_1D3  [TP_1D3_1]  106.99 141.1 0 top
TP80  TP_1D3  [TP_1D3_1]  110.04 139.58 0 top
TP81  TP_1D3  [TP_1D3_1]  104.85 141.1 0 top
TP82  TP_1D3  [TP_1D3_1]  112.07 139.58 0 top
TP83  TP_1D3  [TP_1D3_1]  111.05 141.1 0 top
TP84  TP_1D3  [TP_1D3_1]  114.1 139.58 0 top
TP85  TP_1D3  [TP_1D3_1]  113.08 141.1 0 top
TP86  TP_1D3  [TP_1D3_1]  116.13 139.58 0 top
TP87  TP_1D3  [TP_1D3_1]  115.12 141.1 0 top
TP88  TP_1D3  [TP_1D3_1]  118.16 139.58 0 top
TP89  TP_1D3  [TP_1D3_1]  117.15 141.1 0 top
TP90  TP_1D3  [TP_1D3_1]  120.2 139.58 0 top
TP91  TP_1D3  [TP_1D3_1]  119.18 141.1 0 top
TP101  TP_1D3  [TP_1D3_1]  116.3 80.13 0 top
TP102  TP_1D3  [TP_1D3_1]  116.59 44.45 0 top
TP103  TP_1D3  [TP_1D3_1]  116.24 81.93 0 top
TP104  TP_1D3  [TP_1D3_1]  114.86 56.7 0 top
TP105  TP_1D3  [TP_1D3_1]  114.52 91.14 0 top
TP106  TP_1D3  [TP_1D3_1]  114.71 93.13 0 top
TP107  TP_1D3  [TP_1D3_1]  131.26 100.68 0 top
TP108  TP_1D3  [TP_1D3_1]  133.68 88.21 0 top
TP109  1D3  [TP_1D3_1]  132.64 163.15 180 bottom
TP110  1D3  [TP_1D3_1]  147.38 145.55 180 bottom
TP111  TP_1D3  [TP_1D3_1]  65.99 28.83 0 top
U1  BTB140  [BTB140_MIRROR]  140.37 172.68 90 top
U2  BTB140  [BTB140_MIRROR]  94.55 172.68 90 top
U3  LM393D  [SO8_150_0]  129.43 131.35 180 top
U4  LM393D  [SO8_150_0]  117.21 131.31 180 top
U5  LM393D  [SO8_150_0]  109.78 120.87 180 top
U6  LM393D  [SO8_150_0]  97.56 120.82 180 top
U7  LM393D  [SO8_150_0]  129.51 120.33 180 top
U8  LM393D  [SO8_150_0]  117.29 120.28 180 top
U10  LM393D  [SO8_150_0]  105.79 130.55 180 top
U12  74LVC4245ADB_SSOP  [SOP65P790X140-24N]  142.36 175.29 0 bottom
U14  CE6200B12M  [SOT23_5_11]  114.43 187.7 180 top
U16  LD1117-3.3V  [SOT223_0]  85.38 217.18 180 top
U18  ADM3054BRWZ_SOIC  [HE_SOIC127P1032X265-16]  122.33 202.57 0 top
U19  W25P40-VSNI  [SO8_150_0]  128.39 186.57 270 top
U20  -  [TQG144_LX9]  117.71 159.24 90 top
U36  URB2415YMD-10WR3  [HE_URB_YMD]  26.95 156.1 270 top
U61  URB2415YMD-10WR3  [HE_URB_YMD]  26.95 184.89 270 top
U62  -  [UCC5320SCDWVR]  124.11 79.16 270 top
U63  -  [UCC5320SCDWVR]  124.74 54.37 270 top
U64  -  [UCC5320SCDWVR]  124.14 67 270 top
U65  -  [UCC5320SCDWVR]  124.87 42.44 270 top
U66  -  [UCC5320SCDWVR]  124.28 103.52 270 top
U67  URB2415YMD-10WR3  [HE_URB_YMD]  65.77 156.1 270 top
U68  URB2415YMD-10WR3  [HE_URB_YMD]  26.95 127.28 270 top
U69  -  [UCC5320SCDWVR]  124.08 90.64 270 top
U70  URB2415YMD-10WR3  [HE_URB_YMD]  97.75 95.91 0 top
U71  URB2415YMD-10WR3  [HE_URB_YMD]  26.95 96.25 270 top
U72  URB2415YMD-10WR3  [HE_URB_YMD]  65.77 96.25 270 top
U73  URB2415YMD-10WR3  [HE_URB_YMD]  65.77 127.28 270 top
U74  -  [HCPL060L]  130.99 27.71 0 top
U75  -  [HCPL060L]  137.65 27.95 0 top
U76  -  [HCPL060L]  144.01 27.94 0 top
U77  AD2S1205WSTZ  [HE_LQFP44]  143.74 155.72 270 bottom
U78  TCM809JVNB713  [SOT23_3_01]  136.05 143.44 270 bottom
U79  AD8397ARZ  [SO8_150_0]  112.82 32.14 270 top
U80  TLV431BSN1T1G  [SOT23D_01]  107.34 29.97 90 bottom
U81  -  [ACS770LCB-050B-PFF-T]  48.34 65.19 0 top
U82  -  [ACS770LCB-050B-PFF-T]  24.23 65.19 0 top
U83  -  [ACS770LCB-050B-PFF-T]  99.17 59.2 0 top
U84  -  [ACS770LCB-050B-PFF-T]  75.06 59.2 0 top
U85  OPA2340UAG4  [SO8_150_0]  35.53 47.83 270 bottom
U86  OPA2340UAG4  [SO8_150_0]  86.35 41.84 270 bottom
U87  OPA2340UAG4  [SO8_150_0]  34.92 56.76 270 bottom
U88  OPA2340UAG4  [SO8_150_0]  85.75 50.77 270 bottom
U89  TLP781  [HE_SO4]  54.68 214.96 0 top
U90  -  [UCC5320SCDWVR]  68.21 28.78 270 bottom
U91  URB2405YMD-10WR3  [HE_URB_YMD]  65.6 184.65 0 top
X1  50M  [OSC_SOURCE]  125.02 176.66 180 top
Y1  8.192MHz  [XTAL4_SMD5032_4PIN_01]  149.75 142.6 0 bottom

## Library data of the parts
C1 C50-C52 = CAP_0
C2-C31 C34 C35 C38 C39 C46-C49 C67-C78 C82 C83 C85-C90 C92-C98 C100 C102 C104 C203-C207 C212-C216 = CAP_0: signal model: CAP_0_C0402_11_102_102
C56 C57 C61-C63 C79-C81 C84 C91 C99 C101 C103 C105 C137 C161-C187 C189 C190 C192-C195 C198-C202 C208-C211 = CAP NP
C64 C66 C138-C145 C147-C157 C159 C160 C188 C191 C196 C197 C219 C222 C223 = CAP_0: signal model: DEFAULT_CAPACITOR_1.04e+014pF_2_1
C65 = CAP_0: signal model: DEFAULT_CAPACITOR_1e+07pF_2_1
CN2-CN4 = CON_2/M_0: User Part Number: pn; Tolerance: RichardLC
D5-D7 = DIODES_0
D9-D11 = BAT54S/SOT_0
D12 = D_1
EC1 EC2 EC41-EC45 EC48 EC49 EC51 EC53-EC55 EC57 EC59 EC67-EC69 EC71 EC72 EC74 EC77 EC79 = ALECAP_0: signal model: DEFAULT_CAPACITOR_1e+08pF_2_1
J3 = CON8: User Part Number: pn; Tolerance: RichardLC
J5 = CON4: User Part Number: pn; Tolerance: RichardLC
J6 = CONN PCB 3-R_0: User Part Number: pn; Tolerance: RichardLC
J7 J8 = CON_10A/F_0
J9 = CON6
JP1 = Header 5_0
LED1 = LED_0
Q1-Q12 Q14 = STP75NF75_1
Q13 = MOSFET P_0
R1-R3 R6 R7 R12-R16 R19-R21 R23 R26-R40 R42 R44 R46 R48-R65 R67 R69 R71-R74 R76-R83 R85 R88 R89 R91 R126-R130 R264-R269 R289-R298 R322-R325 R351 = RES_0: signal model: DEFAULT_RESISTOR_330.000000OHM_2_1
R112-R117 R121 R122 R299-R321 R348-R350 = R
R123 R124 R131-R137 = RES_0: signal model: DEFAULT_RESISTOR_33.000000OHM_2_1
R125 = RES_0: signal model: DEFAULT_RESISTOR_10000OHM_2_1
R138 = RES_0: signal model: DEFAULT_RESISTOR_100000OHM_2_1
R270-R281 R283-R288 R357 R358 = RES_0
R326-R347 = RES_0: signal model: DEFAULT_RESISTOR_174000OHM_2_1
REF1-REF3 = PIDUCIAL_POINT_2
T1-T3 = INDUCTOR_0
TP27-TP38 TP40-TP44 TP60 TP69-TP91 TP101-TP108 TP111 = TEST_POINT_0
TP109 TP110 = T POINT R
U1 U2 = BTB140
U3-U8 U10 = LM393_1
U12 = 74LVC4245A
U14 = LDO_SOT23_5_0
U16 = LM1117_1
U18 = ADM3054: User Part Number: pn; Tolerance: RichardLC
U19 = W25P40
U20 = TQG144_LX9
U36 U61 U67 U68 U70-U73 U91 = URB24_0
U62-U66 U69 U90 = UCC53X0
U74-U76 = HCPL060L_0
U77 = AD2S1205: User Part Number: pn; Tolerance: RichardLC
U78 = IMP809_0
U79 U85-U88 = OPA2340/SO
U80 = TLV431_0
U81-U84 = ACS758LCB-050B
U89 = TLP781
X1 = CRYSTAL4_0
Y1 = CRYSTAL_1

## Footprints (pads in the part's own frame, mm; a bottom-side part is the same pattern mirrored in y, then rotated)
ACS770LCB-050B-PFF-T
  round 1 hole 0.5: (-9,0.6) (-8.6,2.1) (-8.4,-0.8) (-7.2,2.7) (-7.2,-1.3) (-5.7,2.7) (-5.7,-1.3) (-4.3,2.7) (-4.2,-1.3) (-2.9,2.6) (-2.8,-1.3) (-1.6,2.2) (-1.5,-0.5) (-1.3,0.9) (1.3,0.9) (1.6,2.3) (1.6,-0.8) (2.9,2.7) (2.9,-1.3) (4.4,2.7) (4.4,-1.3) (5.9,2.7) (6,-1.3) (7.3,2.6) (7.4,-1.3) (8.5,2.1) (8.6,-0.7) (9,0.8)
  round 1.5 hole 0.8: 1(-1.91,-21.4) 2(0,-21.4) 3(1.91,-21.4)
  custom 9.5x6 hole 6x2: 4(5.013,0.762) 5(-5,0.8)
APT30D120BG
  round 2.2 hole 1.6: 1(-5.45,0.8) 2(5.45,0.8)
BTB140_MIRROR
  round 1.321 hole 1.321 unplated: (-30.1,0)
  round 0.914 hole 0.914 unplated: (30.1,0)
  rect 0.508x3.048 smd: 1(-27.6,2.13) 2(-27.6,-2.13) 3(-26.8,2.13) 4(-26.8,-2.13) 5(-26,2.13) 6(-26,-2.13) 7(-25.2,2.13) 8(-25.2,-2.13) 9(-24.4,2.13) 10(-24.4,-2.13) 11(-23.6,2.13) 12(-23.6,-2.13) 13(-22.8,2.13) 14(-22.8,-2.13) 15(-22,2.13) 16(-22,-2.13) 17(-21.2,2.13) 18(-21.2,-2.13) 19(-20.4,2.13) 20(-20.4,-2.13) 21(-19.6,2.13) 22(-19.6,-2.13) 23(-18.8,2.13) 24(-18.8,-2.13) 25(-18,2.13) 26(-18,-2.13) 27(-17.2,2.13) 28(-17.2,-2.13) 29(-16.4,2.13) 30(-16.4,-2.13) 31(-15.6,2.13) 32(-15.6,-2.13) 33(-14.8,2.13) 34(-14.8,-2.13) 35(-14,2.13) 36(-14,-2.13) 37(-13.2,2.13) 38(-13.2,-2.13) 39(-12.4,2.13) 40(-12.4,-2.13) 41(-11.6,2.13) 42(-11.6,-2.13) 43(-10.8,2.13) 44(-10.8,-2.13) 45(-10,2.13) 46(-10,-2.13) 47(-9.2,2.13) 48(-9.2,-2.13) 49(-8.4,2.13) 50(-8.4,-2.13) 51(-7.6,2.13) 52(-7.6,-2.13) 53(-6.8,2.13) 54(-6.8,-2.13) 55(-6,2.13) 56(-6,-2.13) 57(-5.2,2.13) 58(-5.2,-2.13) 59(-4.4,2.13) 60(-4.4,-2.13) 61(-3.6,2.13) 62(-3.6,-2.13) 63(-2.8,2.13) 64(-2.8,-2.13) 65(-2,2.13) 66(-2,-2.13) 67(-1.2,2.13) 68(-1.2,-2.13) 69(-0.4,2.13) 70(-0.4,-2.13) 71(0.4,2.13) 72(0.4,-2.13) 73(1.2,2.13) 74(1.2,-2.13) 75(2,2.13) 76(2,-2.13) 77(2.8,2.13) 78(2.8,-2.13) 79(3.6,2.13) 80(3.6,-2.13) 81(4.4,2.13) 82(4.4,-2.13) 83(5.2,2.13) 84(5.2,-2.13) 85(6,2.13) 86(6,-2.13) 87(6.8,2.13) 88(6.8,-2.13) 89(7.6,2.13) 90(7.6,-2.13) 91(8.4,2.13) 92(8.4,-2.13) 93(9.2,2.13) 94(9.2,-2.13) 95(10,2.13) 96(10,-2.13) 97(10.8,2.13) 98(10.8,-2.13) 99(11.6,2.13) 100(11.6,-2.13) 101(12.4,2.13) 102(12.4,-2.13) 103(13.2,2.13) 104(13.2,-2.13) 105(14,2.13) 106(14,-2.13) 107(14.8,2.13) 108(14.8,-2.13) 109(15.6,2.13) 110(15.6,-2.13) 111(16.4,2.13) 112(16.4,-2.13) 113(17.2,2.13) 114(17.2,-2.13) 115(18,2.13) 116(18,-2.13) 117(18.8,2.13) 118(18.8,-2.13) 119(19.6,2.13) 120(19.6,-2.13) 121(20.4,2.13) 122(20.4,-2.13) 123(21.2,2.13) 124(21.2,-2.13) 125(22,2.13) 126(22,-2.13) 127(22.8,2.13) 128(22.8,-2.13) 129(23.6,2.13) 130(23.6,-2.13) 131(24.4,2.13) 132(24.4,-2.13) 133(25.2,2.13) 134(25.2,-2.13) 135(26,2.13) 136(26,-2.13) 137(26.8,2.13) 138(26.8,-2.13) 139(27.6,2.13) 140(27.6,-2.13)
C0603_01
  rect 0.813x0.991 smd: 1(-0.762,0) 2(0.762,0)
C0805_01
  rect 1.143x1.27 smd: 1(-1.016,0) 2(1.016,0)
C1812_01
  rect 1.829x3.353 smd: 1(-1.93,0) 2(1.93,0)
CON6
  round 2 hole 1.4: 1(-9.573,0) 2(-5.76,0) 3(-1.95,0) 4(1.85,0) 5(5.66,0) 6(9.47,0)
CSD19536KCS
  round 2 hole 1.4: 1(-2.54,0) 2(0,0) 3(2.54,0)
DIR2_54_2X5
  rect 1.74x1.74 hole 0.94: 1(0,0)
  oval 1.651x2 hole 1: 2(0,2.54) 3(2.54,0) 4(2.54,2.54) 5(5.08,0) 6(5.08,2.54) 7(7.62,0) 8(7.62,2.54) 9(10.16,0) 10(10.16,2.54)
ELC0605_01
  rect 3.2x0.813 smd: 1(2.5,0) 2(-2.54,0)
HCPL060L
  oval 0.6x2 smd: 1(-3.81,-2.96) 2(-2.54,-2.96) 3(-1.27,-2.96) 4(0,-2.96) 5(0,2.56) 6(-1.27,2.56) 7(-2.54,2.56) 8(-3.81,2.56)
HDR254M-1X4
  rect 2x2 hole 1: 1(0,0)
  oval 1.651x2 hole 1: 2(2.54,0) 3(5.08,0) 4(7.62,0)
HDR254M_34-2X4
  rect 2x2 hole 1: 1(0,0)
  oval 1.651x2 hole 1: 2(0,2.54) 3(2.54,0) 4(2.54,2.54) 5(5.08,0) 6(5.08,2.54) 7(7.62,0) 8(7.62,2.54)
HE_HDR254M-1X2
  rect 2x2 hole 1: 1(-1.27,0)
  oval 1.651x2 hole 1: 2(1.27,0)
HE_HEADER_SIP_F_2D54_03_01-1X3
  rect 1.7x1.7 hole 0.9: 1(-2.54,0)
  round 1.7 hole 0.9: 2(0,0) 3(2.54,0)
HE_LQFP44
  oval 2.4x0.55 smd: 1(-6.112,4) 2(-6.112,3.2) 3(-6.112,2.4) 4(-6.112,1.6) 5(-6.112,0.8) 6(-6.112,0) 7(-6.112,-0.8) 8(-6.112,-1.6) 9(-6.112,-2.4) 10(-6.112,-3.2) 11(-6.112,-4) 23(6.112,-4) 24(6.112,-3.2) 25(6.112,-2.4) 26(6.112,-1.6) 27(6.112,-0.8) 28(6.112,0) 29(6.112,0.8) 30(6.112,1.6) 31(6.112,2.4) 32(6.112,3.2) 33(6.112,4)
  oval 0.55x2.4 smd: 12(-4,-6.112) 13(-3.2,-6.112) 14(-2.4,-6.112) 15(-1.6,-6.112) 16(-0.8,-6.112) 17(0,-6.112) 18(0.8,-6.112) 19(1.6,-6.112) 20(2.4,-6.112) 21(3.2,-6.112) 22(4,-6.112) 34(4,6.112) 35(3.2,6.112) 36(2.4,6.112) 37(1.6,6.112) 38(0.8,6.112) 39(0,6.112) 40(-0.8,6.112) 41(-1.6,6.112) 42(-2.4,6.112) 43(-3.2,6.112) 44(-4,6.112)
HE_PLT10H
  rect 1.016x5.588 smd: 1(2.6,6.7) 2(-2.6,6.7) 3(-2.6,-6.7) 4(2.6,-6.7)
HE_SO4
  rect 1.499x3.607 smd: 1(-1.27,-5) 2(1.27,-5) 3(1.27,5) 4(-1.27,5)
HE_SOIC127P1032X265-16
  oval 0.6x2.17 smd: 1(-4.445,-4.528) 2(-3.175,-4.528) 3(-1.905,-4.528) 4(-0.635,-4.528) 5(0.635,-4.528) 6(1.905,-4.528) 7(3.175,-4.528) 8(4.445,-4.528) 9(4.445,4.528) 10(3.175,4.528) 11(1.905,4.528) 12(0.635,4.528) 13(-0.635,4.528) 14(-1.905,4.528) 15(-3.175,4.528) 16(-4.445,4.528)
HE_TO-252AA
  rect 1.27x2.54 smd: 1(-2.28,-5) 2(0,-3.5) 3(2.28,-5)
  rect 6.02x6.02 smd: 4(0,5)
HE_URB_YMD
  round 2.794 hole 1.524: 1(2.54,-10.16) 2(-2.54,-10.16) 3(10.16,10.16) 4(0,10.16) 5(-10.16,10.16) 6(-10.16,-10.16)
HEADER5
  round 2 hole 1.4: 1(-9.573,0) 2(-5.76,0) 3(-1.95,0) 4(1.85,0) 5(5.66,0)
LED0805_11
  rect 0.787x1.372 smd: A(-0.965,0) K(0.965,0)
OSC_SOURCE
  rect 1.803x1.397 smd: 1(-1.8,-1.1) 2(1.8,-1.1) 3(1.8,1.1) 4(-1.8,1.1)
R0402_11
  rect 0.559x0.559 smd: 1(-0.483,0) 2(0.483,0)
R0603_01
  rect 0.914x1.016 smd: 1(-0.762,0) 2(0.762,0)
R0805_01
  rect 1.143x1.27 smd: 1(-1.016,0) 2(1.016,0)
R2512_01
  rect 1.524x3.302 smd: 1(-2.921,0) 2(2.921,0)
REFPOINT
  round 1.016 smd: 1(0,0)
SO8_150_0
  oval 0.61x1.88 smd: 1(-1.905,-2.87) 2(-0.635,-2.87) 3(0.635,-2.87) 4(1.905,-2.87) 5(1.905,2.87) 6(0.635,2.87) 7(-0.635,2.87) 8(-1.905,2.87)
SOP65P790X140-24N
  oval 1.8x0.5 smd: 1(-3.46,3.575) 2(-3.46,2.925) 3(-3.46,2.275) 4(-3.46,1.625) 5(-3.46,0.975) 6(-3.46,0.325) 7(-3.46,-0.325) 8(-3.46,-0.975) 9(-3.46,-1.625) 10(-3.46,-2.275) 11(-3.46,-2.925) 12(-3.46,-3.575) 13(3.46,-3.575) 14(3.46,-2.925) 15(3.46,-2.275) 16(3.46,-1.625) 17(3.46,-0.975) 18(3.46,-0.325) 19(3.46,0.325) 20(3.46,0.975) 21(3.46,1.625) 22(3.46,2.275) 23(3.46,2.925) 24(3.46,3.575)
SOT23_3_01
  rect 0.94x0.711 smd: 1(1.079,-0.953) 2(1.079,0.953) 3(-1.079,0)
SOT23_5_11
  rect 0.61x1.219 smd: 1(-0.95,-1.3) 2(0,-1.3) 3(0.95,-1.3) 4(0.95,1.3) 5(-0.95,1.3)
SOT23D_01
  rect 0.94x0.711 smd: A(1.092,-0.94) AK(-1.092,0) K(1.092,0.94)
SOT23DA_01
  rect 0.94x0.711 smd: A1(1.079,-0.953) A2(1.079,0.953) K(-1.079,0)
SOT223_0
  rect 1.143x1.651 smd: 1(-2.3,-3.175) 2(0,-3.175) 3(2.3,-3.175)
  rect 2.997x1.651 smd: 4(0,3.175)
TP_1D3_1
  round 1.295 smd: 1(0,0)
TQG144_LX9
  oval 2x0.25 smd: 1(-11.2,8.75) 2(-11.2,8.25) 3(-11.2,7.75) 4(-11.2,7.25) 5(-11.2,6.75) 6(-11.2,6.25) 7(-11.2,5.75) 8(-11.2,5.25) 9(-11.2,4.75) 10(-11.2,4.25) 11(-11.2,3.75) 12(-11.2,3.25) 13(-11.2,2.75) 14(-11.2,2.25) 15(-11.2,1.75) 16(-11.2,1.25) 17(-11.2,0.75) 18(-11.2,0.25) 19(-11.2,-0.25) 20(-11.2,-0.75) 21(-11.2,-1.25) 22(-11.2,-1.75) 23(-11.2,-2.25) 24(-11.2,-2.75) 25(-11.2,-3.25) 26(-11.2,-3.75) 27(-11.2,-4.25) 28(-11.2,-4.75) 29(-11.2,-5.25) 30(-11.2,-5.75) 31(-11.2,-6.25) 32(-11.2,-6.75) 33(-11.2,-7.25) 34(-11.2,-7.75) 35(-11.2,-8.25) 36(-11.2,-8.75) 73(11.2,-8.75) 74(11.2,-8.25) 75(11.2,-7.75) 76(11.2,-7.25) 77(11.2,-6.75) 78(11.2,-6.25) 79(11.2,-5.75) 80(11.2,-5.25) 81(11.2,-4.75) 82(11.2,-4.25) 83(11.2,-3.75) 84(11.2,-3.25) 85(11.2,-2.75) 86(11.2,-2.25) 87(11.2,-1.75) 88(11.2,-1.25) 89(11.2,-0.75) 90(11.2,-0.25) 91(11.2,0.25) 92(11.2,0.75) 93(11.2,1.25) 94(11.2,1.75) 95(11.2,2.25) 96(11.2,2.75) 97(11.2,3.25) 98(11.2,3.75) 99(11.2,4.25) 100(11.2,4.75) 101(11.2,5.25) 102(11.2,5.75) 103(11.2,6.25) 104(11.2,6.75) 105(11.2,7.25) 106(11.2,7.75) 107(11.2,8.25) 108(11.2,8.75)
  oval 0.25x2 smd: 37(-8.75,-11.2) 38(-8.25,-11.2) 39(-7.75,-11.2) 40(-7.25,-11.2) 41(-6.75,-11.2) 42(-6.25,-11.2) 43(-5.75,-11.2) 44(-5.25,-11.2) 45(-4.75,-11.2) 46(-4.25,-11.2) 47(-3.75,-11.2) 48(-3.25,-11.2) 49(-2.75,-11.2) 50(-2.25,-11.2) 51(-1.75,-11.2) 52(-1.25,-11.2) 53(-0.75,-11.2) 54(-0.25,-11.2) 55(0.25,-11.2) 56(0.75,-11.2) 57(1.25,-11.2) 58(1.75,-11.2) 59(2.25,-11.2) 60(2.75,-11.2) 61(3.25,-11.2) 62(3.75,-11.2) 63(4.25,-11.2) 64(4.75,-11.2) 65(5.25,-11.2) 66(5.75,-11.2) 67(6.25,-11.2) 68(6.75,-11.2) 69(7.25,-11.2) 70(7.75,-11.2) 71(8.25,-11.2) 72(8.75,-11.2) 109(8.75,11.2) 110(8.25,11.2) 111(7.75,11.2) 112(7.25,11.2) 113(6.75,11.2) 114(6.25,11.2) 115(5.75,11.2) 116(5.25,11.2) 117(4.75,11.2) 118(4.25,11.2) 119(3.75,11.2) 120(3.25,11.2) 121(2.75,11.2) 122(2.25,11.2) 123(1.75,11.2) 124(1.25,11.2) 125(0.75,11.2) 126(0.25,11.2) 127(-0.25,11.2) 128(-0.75,11.2) 129(-1.25,11.2) 130(-1.75,11.2) 131(-2.25,11.2) 132(-2.75,11.2) 133(-3.25,11.2) 134(-3.75,11.2) 135(-4.25,11.2) 136(-4.75,11.2) 137(-5.25,11.2) 138(-5.75,11.2) 139(-6.25,11.2) 140(-6.75,11.2) 141(-7.25,11.2) 142(-7.75,11.2) 143(-8.25,11.2) 144(-8.75,11.2)
UCC5320SCDWVR
  oval 0.6x2 smd: 1(-3.81,-5.26) 2(-2.54,-5.26) 3(-1.27,-5.26) 4(0,-5.26) 5(0,4.86) 6(-1.27,4.86) 7(-2.54,4.86) 8(-3.81,4.86)
XELC3R5X8R0_0R5_00
  rect 1.397x1.397 hole 0.762: 1(-1.75,0)
  round 1.397 hole 0.762: 2(1.75,0)
XELC5R0X13R0_0R6_00
  rect 1.524x1.524 hole 0.889: 1(-2.5,0)
  round 1.524 hole 0.889: 2(2.5,0)
XTAL4_SMD5032_4PIN_01
  rect 1.803x1.397 smd: 1(-1.8,-1.1) 2(1.8,-1.1) 3(1.8,1.1) 4(-1.8,1.1)

## Nets
1.2V: C51.1 C52.1 C71.1 C72.1 C73.1 C74.1 C75.1 U14.5(VOUT) U20.19(VINT2) U20.28(VINT3) U20.52(VINT4) U20.89(VINT5) U20.128(VINT)
2.5V: R344.1 R345.1 R347.1 U88.1(OUT) U88.2(-IN)
3.3V: C46.1 C48.1 C50.1 C57.1 C64.1 C66.1 C67.1 C68.1 C69.1 C70.1 C76.1 C78.1 C79.1 C82.1 C83.1 C98.1 C99.1 C100.1 C101.1 C157.1 C159.1 C160.1 D9.A2(2) D10.A2(2) D11.A2(2) J3.7 J5.1 J7.4 R1.2 R6.1 R7.1 R40.2 R42.2 R83.1 R125.2 R126.2 R133.2 R135.2 R136.2 R138.2 R289.2 R293.2 R294.2 U12.23(VCCB2) U12.24(VCCB1) U14.1(VIN) U14.3(CE) U16.2(VOUT2) U16.4(VOUT4) U18.7(VDD1) U19.8(VCC) U20.4(VO33) U20.18(VO31) U20.20(VAUX2) U20.31(VO32) U20.36(VAUX3) U20.42(VO21) U20.53(VAUX4) U20.63(VO22) U20.76(VO12) U20.86(VO13) U20.90(VAUX5) U20.103(VO11) U20.122(VO01) U20.125(VO02) U20.129(VAUX1) U20.135(VO03) U74.7(ENA) U74.8(VCC) U75.7(ENA) U75.8(VCC) U76.7(ENA) U76.8(VCC) X1.4(VDD)
5.0V: C47.1 C49.1 C56.1 C77.1 C102.1 C103.1 C104.1 C105.1 C137.1 C151.1 C152.1 C153.1 C154.1 C155.1 C156.1 C163.2 C164.1 C165.2 C168.2 C170.1 C171.2 C188.1 C189.1 C191.1 C192.1 C194.1 C196.1 C197.1 C198.1 C199.1 C200.1 C201.1 C202.1 C203.1 C204.1 C205.1 C206.1 C207.1 C208.1 C209.1 C210.1 C211.1 C212.1 C213.1 C214.1 C215.1 C216.1 EC1.1(+) EC2.1(+) R2.1 R12.1 R13.1 R15.1 R35.1 R36.1 R38.1 R61.1 R62.1 R64.1 R88.1 R300.1 R314.2 R315.2 R316.1 R343.1 U1.133 U1.134 U1.135 U1.136 U1.137 U1.138 U1.139 U1.140 U2.137 U2.138 U2.139 U2.140 U12.1(VCCA) U16.3(VIN) U18.13(VDD2) U62.1(VCC1) U63.1(VCC1) U64.1(VCC1) U65.1(VCC1) U66.1(VCC1) U69.1(VCC1) U77.1(DVDD1) U77.17(DVDD2) U77.39(AVDD1) U78.3(VDD) U81.1(VCC) U82.1(VCC) U83.1(VCC) U84.1(VCC) U85.8(+VCC) U86.8(+VCC) U87.8(+VCC) U88.8(+VCC) U90.1(VCC1) U91.3(VO)
15.0V: C183.2 C184.2 R290.2 R291.1 R295.2 R296.2 U36.3(VO) U79.8(+VCC)
+15V: C34.1 C35.1 C80.1 C84.1 C85.1 C86.1 C87.1 C88.1 C89.1 C90.1 U3.8(V+) U4.8(V+) U5.8(V+) U6.8(V+) U7.8(V+) U8.8(V+) U10.8(V+)
-15V: C38.1 C39.1 C81.1 C91.1 C92.1 C93.1 C94.1 C95.1 C96.1 C97.1 U3.4(V-) U4.4(V-) U5.4(V-) U6.4(V-) U7.4(V-) U8.4(V-) U10.4(V-)
GND_AH: C138.1 C140.2 EC41.2(-) R274.1 U62.8(GND2) U67.5(GND2)
GND_AL: C142.1 C144.2 EC43.2(-) R280.1 U64.8(GND2) U68.5(GND2)
GND_BH: C139.1 C141.2 EC42.2(-) R275.1 U63.8(GND2) U70.5(GND2) U72.5(GND2)
GND_BL: C143.1 C145.2 EC44.2(-) R281.1 U65.8(GND2) U71.5(GND2)
GND_CH: C147.1 C148.2 EC49.2(-) R285.1 U66.8(GND2) U73.5(GND2)
GND_CL: C149.1 C150.2 EC54.2(-) R288.1 U69.8(GND2)
GND_MOSFET: Q7.2(DRAIN) Q8.2(DRAIN) Q12.2(DRAIN) U84.4(IP+)
GND_POWER: C222.1 C223.2 EC45.2(-) EC48.2(-) EC51.2(-) EC53.2(-) EC55.2(-) EC57.2(-) EC59.2(-) EC67.2(-) EC68.2(-) EC71.2(-) EC72.2(-) EC74.2(-) EC77.2(-) EC79.2(-) J9.2 Q13.3(SOURCE) Q14.3 R337.1 U36.2(GND1) U61.2(GND1) U61.5(GND2) U67.2(GND1) U68.2(GND1) U70.2(GND1) U71.2(GND1) U72.2(GND1) U73.2(GND1) U84.5(IP-) U89.3(2C) U90.8(GND2) U91.2(GND1)
GND_SIGNAL: C1.2 C2.2 C3.2 C4.2 C5.2 C6.2 C7.2 C8.1 C9.1 C10.2 C11.2 C12.2 C13.2 C14.2 C15.2 C16.2 C17.2 C18.2 C19.1 C20.1 C21.2 C22.2 C23.2 C24.2 C25.2 C26.2 C27.1 C28.1 C29.1 C30.1 C31.2 C34.2 C35.2 C38.2 C39.2 C46.2 C47.2 C48.2 C49.2 C50.2 C51.2 C52.2 C56.2 C57.2 C61.2 C63.1 C64.2 C65.2 C66.2 C67.2 C68.2 C69.2 C70.2 C71.2 C72.2 C73.2 C74.2 C75.2 C76.2 C77.2 C78.2 C79.2 C80.2 C81.2 C82.2 C83.2 C84.2 C85.2 C86.2 C87.2 C88.2 C89.2 C90.2 C91.2 C92.2 C93.2 C94.2 C95.2 C96.2 C97.2 C98.2 C99.2 C100.2 C101.2 C102.2 C103.2 C104.2 C105.2 C137.2 C151.2 C152.2 C153.2 C154.2 C155.2 C156.2 C157.2 C159.2 C160.2 C161.2 C162.2 C163.1 C164.2 C165.1 C166.2 C167.1 C168.1 C170.2 C171.1 C173.2 C174.1 C177.1 C179.2 C182.1 C183.1 C184.1 C185.1 C186.2 C187.2 C188.2 C189.2 C190.2 C191.2 C192.2 C193.2 C194.2 C195.2 C196.2 C197.2 C198.2 C199.2 C200.2 C201.2 C202.2 C203.2 C204.2 C205.2 C206.2 C207.2 C208.2 C209.2 C210.2 C211.2 C212.2 C213.2 C214.2 C215.2 C216.2 C219.2 D9.A1(1) D10.A1(1) D11.A1(1) EC1.2(-) EC2.2(-) EC69.2(-) J3.2 J5.4 J6.3 J7.2 J7.10 J8.9 J8.10 JP1.5 LED1.K(KATHODE) R3.1 R32.1 R33.1 R34.1 R58.1 R59.1 R60.1 R80.1 R81.1 R82.1 R89.1 R112.1 R113.1 R114.1 R115.1 R116.1 R117.1 R123.2 R131.2 R134.2 R301.1 R319.1 R320.1 R321.1 R329.1 R330.1 R332.1 R333.1 R346.1 U1.1 U1.2 U1.19 U1.20 U1.43 U1.44 U1.65 U1.66 U1.67 U1.68 U1.87 U1.88 U1.109 U1.110 U1.129 U1.130 U1.131 U1.132 U2.1 U2.2 U2.27 U2.28 U2.41 U2.42 U2.55 U2.56 U2.63 U2.64 U2.77 U2.78 U2.93 U2.94 U2.111 U2.112 U2.135 U2.136 U10.5(+IN) U10.6(-IN) U12.2(DIR) U12.11(GND1) U12.12(GND2) U12.13(GND3) U14.2(GND) U16.1(GND/ADJ) U18.2(GND11) U18.3(GND12) U18.8(GND13) U18.9(GND21) U18.16(GND22) U19.4(GND) U20.3(GND8) U20.13(GND3) U20.25(GND7) U20.49(GND9) U20.54(GND10) U20.68(GND11) U20.77(GND12) U20.91(GND13) U20.96(GND14) U20.108(GND1) U20.113(GND2) U20.130(GND4) U20.136(GND5) U36.5(GND2) U62.4(GND1) U63.4(GND1) U64.4(GND1) U65.4(GND1) U66.4(GND1) U69.4(GND1) U74.5(GND) U75.5(GND) U76.5(GND) U77.16(DGND1) U77.23(DGND2) U77.36(AGND) U77.42(AGND2) U78.1(GND) U79.4(-VCC) U80.AK(A) U81.2(GND) U82.2(GND) U83.2(GND) U84.2(GND) U85.4(-VCC) U86.4(-VCC) U87.4(-VCC) U88.4(-VCC) U89.2(1C) U90.3(IN-) U90.4(GND1) U91.5(GND2) X1.2(GND) Y1.2(G2) Y1.4(G1)
VCCAH: C140.1 EC41.1(+) U62.5(VCC2) U67.3(VO)
VCCAL: C144.1 EC43.1(+) U64.5(VCC2) U68.3(VO)
VCCBH: C141.1 EC42.1(+) U63.5(VCC2) U70.3(VO)
VCCBL: C145.1 EC44.1(+) U65.5(VCC2) U71.3(VO) U72.3(VO)
VCCCH: C148.1 EC49.1(+) TP107.1(NC) U66.5(VCC2) U73.3(VO)
VCCCL: C150.1 EC54.1(+) TP108.1(NC) U69.5(VCC2)
A: R292.1 U1.111 U1.112 U1.123 U1.124 U20.83(P83) U77.25(A)
AD2S1205_C1: U1.59 U1.60 U20.62(P62)
AD2S1205_C2: U1.55 U1.56 U20.59(P59)
AD2S1205_C3: U1.51 U1.52 U20.57(P57)
AD2S1205_C4: U1.49 U1.50 U20.56(P56)
AD2S1205_CS_RD: U1.47 U1.48 U20.55(P55) U77.2(\\R\D) U77.3(\\C\S)
AD2S1205_DBI0: U1.17 U1.18 U20.33(P33) U77.20(DB0)
AD2S1205_DBI1: U1.15 U1.16 U20.32(P32) U77.19(DB1)
AD2S1205_DBI2: U1.23 U1.24 U20.35(P35) U77.18(DB2)
AD2S1205_DBI3: U1.21 U1.22 U20.34(P34) U77.15(DB3)
AD2S1205_DBI4: U1.27 U1.28 U20.41(P41) U77.14(DB4)
AD2S1205_DBI5: U1.25 U1.26 U20.40(P40) U77.13(DB5)
AD2S1205_DBI6: U1.31 U1.32 U20.44(P44) U77.12(DB6)
AD2S1205_DBI7: U1.29 U1.30 U20.43(P43) U77.11(DB7)
AD2S1205_DBI8: U1.35 U1.36 U20.46(P46) U77.10(DB8)
AD2S1205_DBI9: U1.33 U1.34 U20.45(P45) U77.9(DB9)
AD2S1205_DBI10: U1.39 U1.40 U20.48(P48) U77.8(DB10/SCLK)
AD2S1205_DBI11: U1.37 U1.38 U20.47(P47) U77.7(DB11/SO)
AD2S1205_DBI12: U1.61 U1.62 U20.66(P66)
AD2S1205_DBI13: U1.63 U1.64 U20.67(P67)
AD2S1205_DBI14: U1.13 U1.14 U20.30(P30)
AD2S1205_DBI15: U1.11 U1.12 U20.29(P29)
AD2S1205_DBI16: U1.9 U1.10 U20.27(P27)
AD2S1205_DBI17: U1.7 U1.8 U20.26(P26)
AD2S1205_DBI18: U1.5 U1.6 U20.24(P24)
AD2S1205_DBI19: U1.3 U1.4 U20.23(P23)
AD2S1205_DBI20: U2.3 U2.4 U20.143(P143)
AD2S1205_DBI21: U2.5 U2.6 U20.142(P142)
AD2S1205_DBI22: U2.7 U2.8 U20.141(P141)
AD2S1205_DBI23: U2.9 U2.10 U20.140(P140)
AD2S1205_DBI24: U2.11 U2.12 U20.139(P139)
AD2S1205_DBI25: U2.13 U2.14 U20.138(P138)
AD2S1205_DBI26: U2.15 U2.16 U20.137(P137)
AD2S1205_DBI27: U2.17 U2.18 U20.134(P134_GCLK19)
AD2S1205_DBI28: U2.19 U2.20 U20.133(P133_GCLK18)
AD2S1205_DBI29: U2.21 U2.22 U20.132(P132_GCLK17)
AD2S1205_DBI30: U2.23 U2.24 U20.131(P131_GCLK16)
AD2S1205_DBI31: U2.25 U2.26 U20.127(P127_GCLK15)
AD2S1205_DOS: U1.57 U1.58 U20.61(P61) U77.29(DOS)
AD2S1205_LOT: U1.53 U1.54 U20.58(P58) U77.30(LOT)
AD2S1205_RDVEL: U1.41 U1.42 U20.50(P50) U77.5(\\R\D\V\E\L)
AD2S1205_SAMPLE: U1.45 U1.46 U20.51(P51) U77.4(\\S\A\M\P\L\E)
ADCTEST: R2.2 R3.2 U2.43 U2.44 U2.47 U2.48 U2.49 U2.50 U2.67 U2.68 U2.69 U2.70 U2.71 U2.72 U2.81 U2.82 U2.83 U2.84
ASCLIN3_IN: J3.8 U2.113 U2.114
ASCLIN3_OUT: J3.1 U2.115 U2.116
B: R297.1 U1.113 U1.114 U1.125 U1.126 U20.82(P82) U77.26(B)
C_BREAK: R351.1 U2.35 U2.36
C_FAN: R349.1 U2.37 U2.38
C_PU+: R267.2 U12.20(B1)
C_PU-: R266.2 U12.21(B0)
C_PV+: R265.2 U12.18(B3)
C_PV-: R264.2 U12.19(B2)
C_PW+: R269.2 U12.16(B5)
C_PW-: R268.2 U12.17(B4)
CAN0_RX: U1.121 U1.122 U18.5(RXD)
CAN0_TX: U1.119 U1.120 U18.6(TXD)
CAN1H: C62.1 C63.2 CN2.1 R122.1
CAN1L: C61.1 C62.2 CN2.2 R121.1
COS: C179.1 C181.2 R310.2 R312.2 U77.41(COS)
COSL: C181.1 C185.2 R312.1 R313.2 U77.40(COSL)
COSN: J8.2 T3.4
COSP: J8.1 T3.1
EXC: C172.1 U77.34(EXC)
EXC_OUT: C176.2 J8.5 T2.2
FAULT: D5.A1(1) D5.A2(3) D6.A1(1) D6.A2(3) D7.A1(1) D7.A2(3) R1.1 U2.119 U2.120
FPGA_CLK: R137.1 U20.84(P84_GCLK4)
FPGA_TCK: R127.1 U20.109(TCK)
FPGA_TDI: R130.1 U20.110(TDI)
FPGA_TDO: R128.1 U20.106(TDO)
FPGA_TMS: R129.1 U20.107(TMS)
FS1: R315.1 R320.2 U77.31(FS1)
FS2: R314.1 R319.2 U77.32(FS2)
IDC_C: R331.2 U2.85 U2.86 U86.7(OUT)
IU_C: C4.1 C6.1 R21.1 R23.1 R326.2 U2.45 U2.46 U85.1(OUT)
IV-GND_MOSFET: C195.1 R324.1 U86.5(+IN)
IV-U: C187.1 R322.1 U85.3(+IN)
IV-V: C190.1 R323.1 U85.5(+IN)
IV-W: C193.1 R325.1 U86.3(+IN)
IV_C: C12.1 C15.1 R46.1 R48.1 R327.2 U2.65 U2.66 U85.7(OUT)
IW_C: C23.1 C25.1 R69.1 R73.1 R328.2 U2.79 U2.80 U86.1(OUT)
NEXC: C180.1 U77.35(\\E\X\C)
NEXC_OUT: C176.1 J8.6 T2.3
NRESET: R301.2 U77.33(\\R\E\S\E\T) U78.2(R\E\S\E\T\)
OSC_IN: C162.1 U77.22(CLKIN) Y1.1
OSC_OUT: R299.1 U77.21(XYALOUT)
PB: D12.2(A) J9.3 Q14.2(DRAIN)
POWER_15.0V: C223.1 EC71.1(+) R348.1 TP111.1(NC) U61.3(VO) U90.5(VCC2)
PU+: R116.2 TP103.1(NC) U12.4(A1) U62.2(IN+) U64.3(IN-)
PU-: R117.2 TP101.1(NC) U12.3(A0) U62.3(IN-) U64.2(IN+)
PV+: R114.2 TP105.1(NC) U12.6(A3) U66.2(IN+) U69.3(IN-)
PV-: R115.2 TP106.1(NC) U12.5(A2) U66.3(IN-) U69.2(IN+)
PW+: R112.2 TP102.1(NC) U12.8(A5) U63.2(IN+) U65.3(IN-)
PW-: R113.2 TP104.1(NC) U12.7(A4) U63.3(IN-) U65.2(IN+)
PWM_OE: U2.117 U2.118 U12.22(\\O\E)
QEPA: JP1.2 U74.3(CATHODE)
QEPB: JP1.3 U75.3(CATHODE)
QEPZ: JP1.4 U76.3(CATHODE)
REFBYP: C166.1 C167.2 U77.43(REFBYP)
RESET: C65.1 R126.1 U19.3(/WP) U20.105(P105)
RLY: LED1.A(ANODE) U2.39 U2.40
SIN: C173.1 C175.2 R304.2 R305.2 U77.37(SIN)
SINL: C175.1 C177.2 R305.1 R307.2 U77.38(SINL)
SINN: J8.3 T1.4
SINP: J8.4 T1.1
SPI_CLK: U19.6(CLK) U20.70(P70_CCLK_2)
SPI_CS: U19.1(/CS) U20.38(P38_CSO)
SPI_MISO: R124.2 U20.65(P65_MISO)
SPI_MOSI: R132.2 U19.5(DI)
TCK: J7.1 R127.2
TDI: J7.9 R130.2
TDO: J7.3 R128.2
TMS: J7.5 R129.2
TZ1: C14.1 D7.K(2) D9.K(3) R49.2 U2.121 U2.122
TZ2: C18.1 D6.K(2) D10.K(3) R51.2 U2.123 U2.124
U_A: Q3.2(DRAIN) Q5.2(DRAIN) R338.1 U81.4(IP+)
U_B: J9.4 U81.5(IP-)
UART1_RXD_33: J6.1 U1.97 U1.98
UART1_TXD_33: J6.2 U1.101 U1.102
UDC_POWER: CN3.1 CN4.1 D12.1(K) EC45.1(+) EC48.1(+) EC51.1(+) EC53.1(+) EC55.1(+) EC57.1(+) EC59.1(+) EC67.1(+) EC68.1(+) EC72.1(+) EC74.1(+) EC77.1(+) EC79.1(+) J9.1 Q1.2(DRAIN) Q2.2(DRAIN) Q9.2(DRAIN) R339.1 U36.1(VIN) U61.1(VIN) U67.1(VIN) U68.1(VIN) U70.1(VIN) U71.1(VIN) U72.1(VIN) U73.1(VIN) U91.1(VIN)
V_A: Q10.2(DRAIN) Q11.2(DRAIN) R340.1 R342.1 U82.4(IP+)
V_B: J9.5 U82.5(IP-)
VDC_C: R85.1 R334.2 U2.87 U2.88 U87.1(OUT)
VOE: C31.1 D5.K(2) D11.K(3) R83.2 R91.2 U2.125 U2.126 U10.1(OUT)
VREF_3: C174.2 C182.2 C186.1 R317.2 R318.2 U79.3(+IN) U79.5(+IN) U80.K
VUV_C: R335.2 U2.75 U2.76 U87.7(OUT)
VVW_C: R336.2 U2.53 U2.54 U88.7(OUT)
W_A: Q4.2(DRAIN) Q6.2(DRAIN) R341.1 U83.4(IP+)
W_B: J9.6 U83.5(IP-)
Z: R298.1 U77.27(N/M)
ZIGBEE_RXD: J5.2 U1.117 U1.118
ZIGBEE_TXD: J5.3 U1.115 U1.116
